# Altium PCB MCPS Supply 030523.PcbDoc
Units mm, origin at the board's own origin, x right, y up, seen from the top; angles counter-clockwise.
Board outline 140 x 100.33 mm, 2 copper layers (Top Layer, Bottom Layer); 45 components, 22 nets, 100 pads, 8 vias.
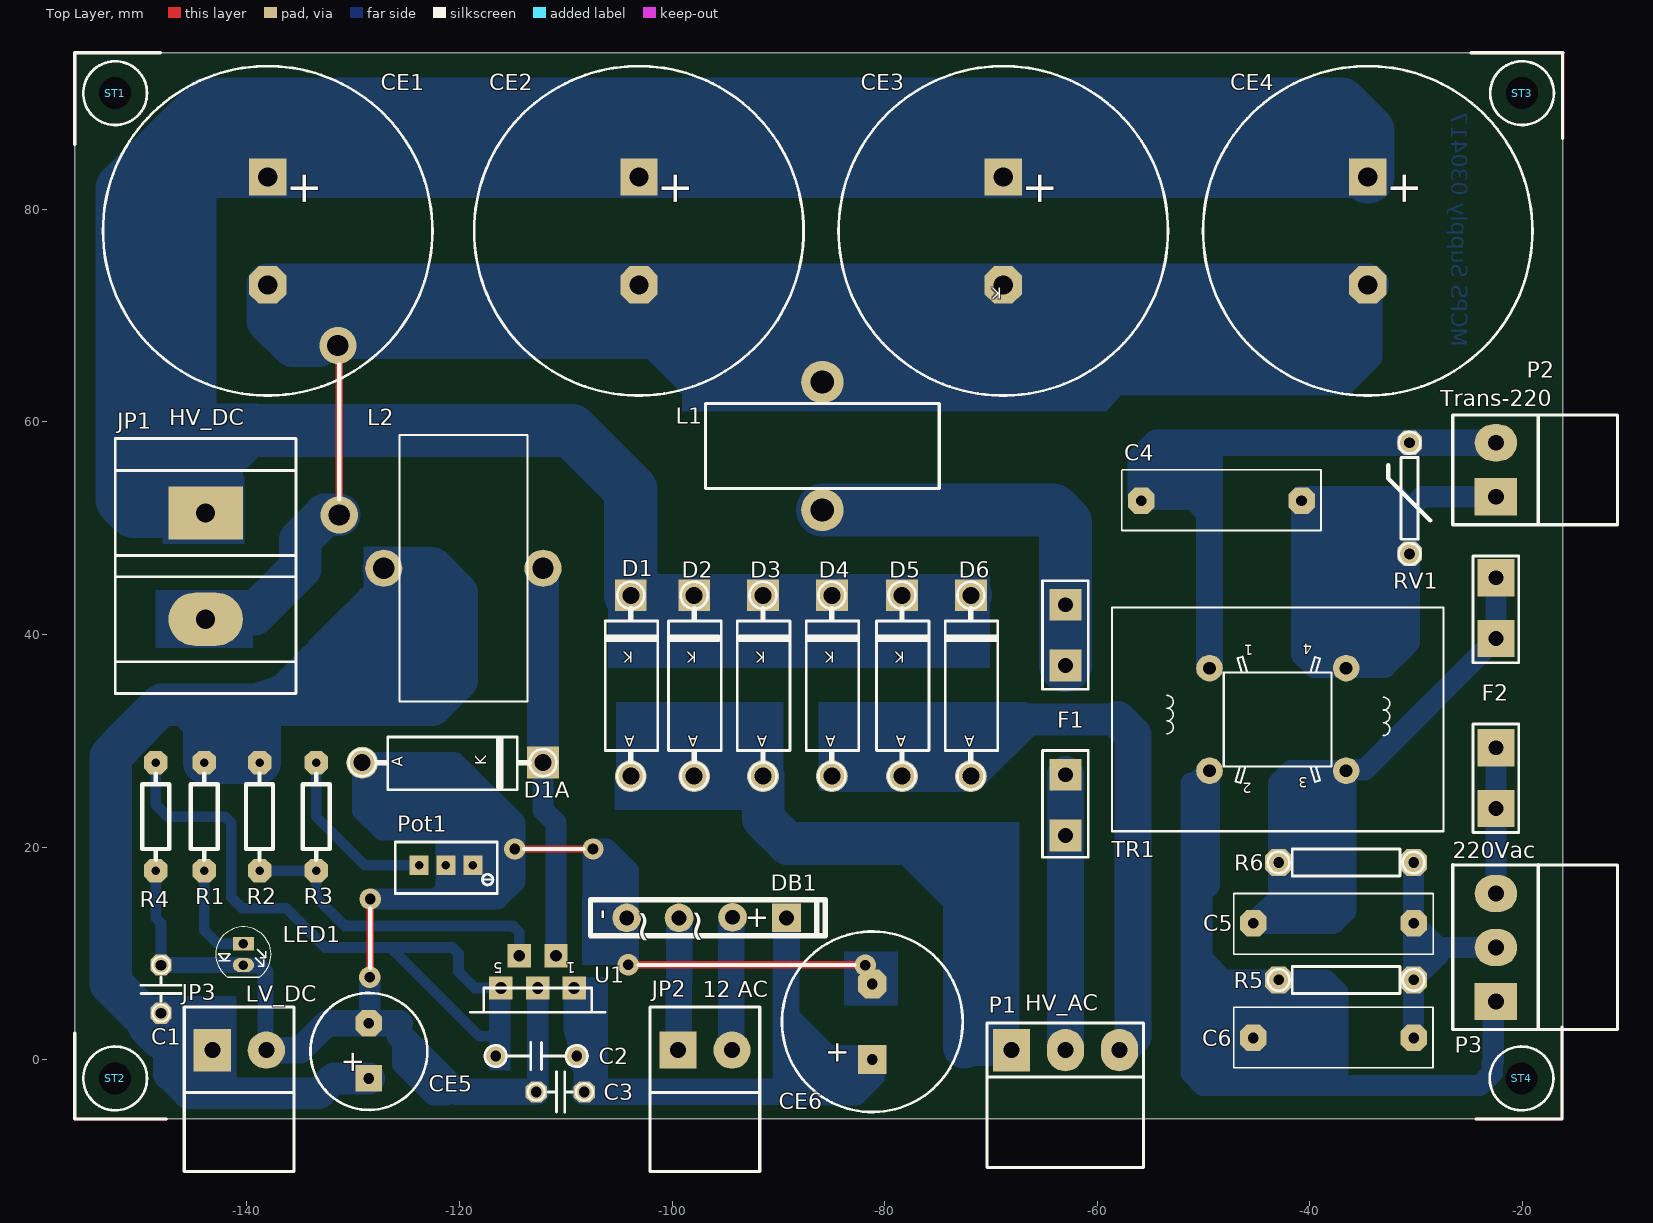
[diagram p0: Top Layer view]
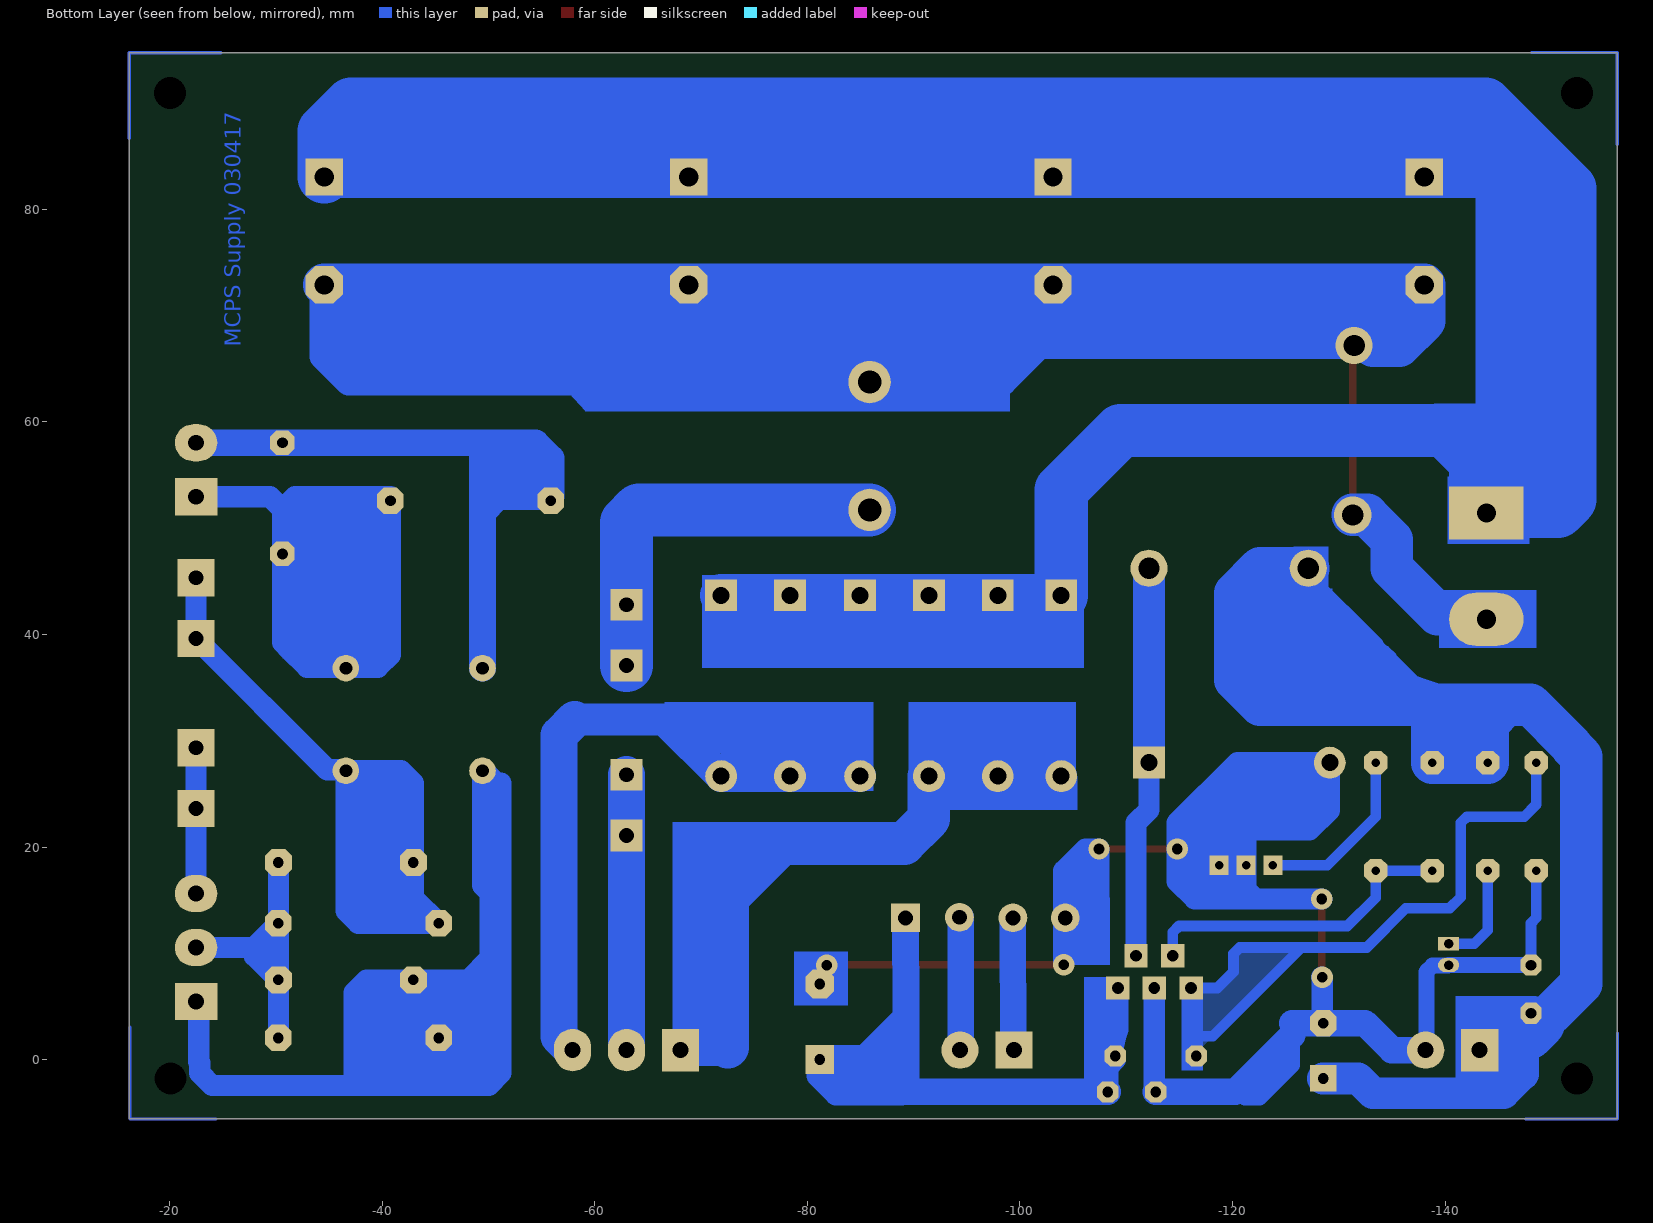
[diagram p1: Bottom Layer view, seen from below]

## Layer stack, top to bottom
Top Solder: solder mask 0.0102, Solder Resist, Dk 3.5
Top Layer: signal copper 0.0356
Dielectric1: dielectric 0.32, FR-4, Dk 4.8
Bottom Layer: signal copper 0.0356
Bottom Solder: solder mask 0.0102, Solder Resist, Dk 3.5

## Board outline
-156.21,-5.588 -156.21,94.742 -16.21,94.742 -16.21,-5.588

## Design rules (kind name [scope] priority, off if disabled: settings)
Clearance [All] p1: gap=0.3 ignorepadtopadclearanceinfootprint=FALSE
ComponentClearance [All] p1 off: gap=0.254 collisioncheckmode=3 verticalgap=0.254 showdistances=FALSE
PolygonConnect [All] p1: connectstyle=Direct reliefconductorwidth=1 reliefentries=4 polygonreliefangle="90 Angle" airgapwidth=0.3
RoutingVias [All] p1: holewidth=0.711 width=1.27 viastyle="Through Hole" minholewidth=0.711 minwidth=1.27 maxholewidth=0.711 maxwidth=1.27
SilkToSolderMaskClearance SilkscreenOverComponentPads [IsPad] p1: minsilkscreentomaskgap=0.254 clearancetoexposedcopper=TRUE
SolderMaskExpansion [All] p1: expansion=0.102 istentingtop=FALSE
UnRoutedNet [All] p1: checkbadconnections=TRUE
Width [All] p1: maxlimit=5 minlimit=0.3 preferedwidth=0.7 minimp=50.000000 maximp=50.000000 favimp=50.000000
27 further rules are at their usual default settings.

## Components (designator, comment, footprint, x,y, rotation, side; value= is the part's Value field where it differs from the comment)
C1 "100N" c1.8p -148.082,4.369 r90 top locked
C2 "100N" C3P -108.979,0.33 r180 top
C3 "100N" c1.8p -108.255,-3.048 r180 top
C4 "47N/275" 47N275 -38.938,52.629 r180 top locked
C5 "47N/275" 47N275 -47.142,12.776 r0 top locked
C6 "47N/275" 47N275 -28.397,2.083 r180 top locked
CE1 "1200M/160V" CAP5P -138.049,83.058 r270 top locked
CE2 "1200M/160V" CAP5P -103.124,83.058 r270 top locked
CE3 "1200M/160V" CAP5P -68.834,83.058 r270 top locked
CE4 "1200M/160V" CAP5P -34.544,83.058 r270 top locked
CE5 "1000M/63" CAP2P -128.524,-1.778 r180 top locked
CE6 "2200M/25" CAP3P -81.915,0.127 r180 top locked
D1 "1N5408" D54 -103.886,35.179 r180 top locked
D1A "1N5822" d54 -120.65,27.94 r90 top locked
D2 "1N5408" D54 -97.917,35.179 r180 top locked
D3 "1N5408" D54 -91.44,35.179 r180 top locked
D4 "1N5408" D54 -84.963,35.179 r180 top locked
D5 "1N5408" D54 -78.359,35.179 r180 top locked
D6 "1N5408" D54 -71.882,35.179 r180 top locked
DB1 "4Amp" "BRG GBU" -104.267,13.335 r270 top locked
F1 "5A" FS#1 -62.992,42.799 r270 top locked
F2 "1A5" FS#2 -22.479,23.622 r90 top locked
JP1 "HV_DC" DG55X2 -143.891,51.435 r270 top locked
JP2 "12 AC" 2edg-str#1 -99.441,0.889 r180 top locked
JP3 "LV_DC" 2edg-str#2 -143.256,0.889 r180 top locked
L1 "2mH/5A" INDUCTOR2208 -85.852,57.734 r0 top locked
L2 "100UH" Inductor2512 -119.634,46.228 r90 top locked
LED1 "Red" LED-5mm -140.325,10.89 r0 top locked
P1 "HV_AC" 3EDG -68.072,0.889 r180 top locked
P2 "Trans-220" 2EDG-str -22.479,52.959 r270 top locked
P3 "220Vac" 3EDG-str -22.454,5.436 r270 top locked
Pot1 "1K" "pot multi turn" -118.745,18.288 r90 top locked
R1 "1K" R4P -144.018,27.94 r0 top locked
R2 "10K%" R4P -138.811,27.94 r0 top locked
R3 "3K%" R4P -133.477,17.78 r180 top locked
R4 "10K%" R4P -148.59,27.94 r0 top locked
R5 "470K" R5P -30.226,7.493 r180 top locked
R6 "470K" R5P -42.926,18.542 r0 top locked
RV1 "250Vrms" VARISTOR3 -30.607,52.807 r180 top locked
ST1 "STUD" CORNER -156.21,94.742 r0 top locked
ST2 "STUD" CORNER -156.21,-5.588 r90 top locked
ST3 "STUD" CORNER -16.21,94.742 r270 top locked
ST4 "STUD" CORNER -16.256,-5.588 r180 top locked
TR1 "CMT" CMT1 -43.002,32.004 r270 top locked
U1 "LM2576T-ADJ" PENTA1 -109.22,6.731 r270 top locked

## Footprints (in the part's own frame and the unit in brackets; to place one, negate y for a bottom-side part, rotate by r counter-clockwise, add the part's x,y. Pads: shape width x height; smd on the part's side, far side on the other; paste and mask are expansions set on the pad)
2edg-str#1 [mm]
  rect 3.5x3.5 hole 1.5: 1(0,0)
  round 3.5 hole 1.5: 2(-5.08,0)
  silkscreen extent -7.7,-4.06 2.64,11.43
2edg-str#2 [mm]
  rect 3.5x4 hole 1.5: 1(0,0)
  round 3.5 hole 1.5: 2(-5.08,0)
  silkscreen extent -7.7,-4.06 2.64,11.43
2EDG-str [mm]
  rect 3.5x4 hole 1.5: 1(0,0)
  oval 3.5x4 hole 1.5: 2(-5.08,0)
  silkscreen extent -7.7,-4.06 2.64,11.43
3EDG [mm]
  rect 3.5x4 hole 1.5: 1(0,0)
  oval 3.5x4 hole 1.5: 2(-5.08,0) 3(-10.16,0)
  silkscreen extent -12.45,-2.54 2.29,11.05
3EDG-str [mm]
  rect 3.5x4 hole 1.5: 1(-0.025,-0.025)
  oval 3.5x4 hole 1.5: 2(-5.105,-0.025) 3(-10.185,-0.025)
  silkscreen extent -12.93,-4.09 2.62,11.41
47N275 [mm]
  oct 2.5x2.5 hole 1: 1(1.829,0.051) 2(16.916,0.051)
  silkscreen extent 0,-2.85 18.75,2.86
"BRG GBU" [mm]
  round 2.7 hole 1.4: 1(0,4.928) 2(0,0) 3(-0.051,9.957)
  rect 2.7x2.7 hole 1.4: 4(0,15.037)
  silkscreen extent -1.7,-3.41 1.7,18.69
c1.8p [mm]
  oct 2x2 hole 1: 1(0,0) 2(4.521,0)
  silkscreen extent -0.8,-1.91 5.32,1.9
C3P [mm]
  oct 2x2 hole 1: 1(0,0) 2(7.62,0)
  silkscreen extent -1.02,-1.27 8.63,1.27
CAP2P [mm]
  rect 2.5x2.5 hole 1: 1(0,0)
  oct 2.5x2.5 hole 1: 2(0,-5.207)
  silkscreen extent -5.5,-8.04 5.5,2.96
CAP3P [mm]
  rect 2.7x2.7 hole 1: 1(-0.762,0.127)
  oct 2.7x2.7 hole 1: 2(-0.762,-6.985)
  silkscreen extent -9.26,-11.93 7.73,5.07
CAP5P [mm]
  rect 3.5x3.5 hole 1.8: 1(0,0)
  oct 3.5x3.5 hole 1.8: 2(10.16,0)
  silkscreen extent -10.42,-15.5 20.58,15.5
CMT1 [mm]
  round 2.5 hole 1.2: 1(-4.826,-6.426) 2(4.826,-6.426) 3(4.826,6.426) 4(-4.826,6.426)
  silkscreen extent -10.52,-15.6 10.52,15.6
CORNER [mm]
  round 2 hole 3: 1(3.81,-3.81)
  Multi-Layer lines w0.3: 0,-8.623 0,0.013 8.09,0.013
  silkscreen extent 0,-8.62 8.09,0.01
D54 [mm]
  round 3 hole 1.6: 1(0,8.509)
  rect 3x3 hole 1.6: 2(0,-8.509)
  silkscreen extent -2.54,-9.78 2.41,9.78
d54 [mm]
  round 3 hole 1.6: 1(0,8.509)
  rect 3x3 hole 1.6: 2(0,-8.509)
  silkscreen extent -2.54,-9.78 2.41,9.78
DG55X2 [mm]
  rect 5x7 hole 1.8: 1(0,0)
  oval 5x7 hole 1.8: 2(10,0)
  silkscreen extent -7,-8.5 17,8.5
FS#1 [mm]
  rect 3x3 hole 1.4: 1(0,0) 2(21.717,0) ""(5.715,0) ""(16.002,0)
  silkscreen extent -2.25,-2.16 23.76,2.16
FS#2 [mm]
  rect 3.5x3.5 hole 1.4: 1(0,0) 2(21.717,0) ""(5.715,0) ""(16.002,0)
  silkscreen extent -2.25,-2.16 23.76,2.16
INDUCTOR2208 [mm]
  round 4 hole 2.2: 1(0,6.02) 2(0,-6.02)
  silkscreen extent -11,-3.99 11,3.99
Inductor2512 [mm]
  round 3.5 hole 2: 1(0,7.493) 2(0,-7.493)
  silkscreen extent -12.52,-6.02 12.52,6.02
LED-5mm [mm]
  rect 2x1.3 hole 0.9: 1(-0.01,0)
  oval 2x1.3 hole 0.9: 2(-0.01,-2)
  silkscreen extent -2.61,-3.13 2.59,1.6
PENTA1 [mm]
  rect 2.2x2.2 hole 1.1: 1(0,0) 2(-3.048,-1.702) 3(0,-3.429) 4(-3.048,-5.156) 5(0,-6.883)
  silkscreen extent 0,-9.78 2.29,2.92
"pot multi turn" [mm]
  rect 1.8x1.8 hole 0.8: 1(0,5.06) 2(0,0) 3(0,2.53)
  silkscreen extent -2.67,-2.29 2.18,7.29
R4P [mm]
  oct 2.2x2.2 hole 0.8: 1(0,0) 2(0,-10.16)
  silkscreen extent -1.27,-9.14 1.27,-1.02
R5P [mm]
  oct 2.54x2.54 hole 1: 1(0,0) 2(12.7,0)
  silkscreen extent -1.02,-1.27 13.71,1.27
VARISTOR3 [mm]
  oct 2.3x2.3 hole 1: 1(0,5.232) 2(0,-5.232)
  silkscreen extent -1.95,-6.25 2.01,6.25

## Part data
C1 C2 C3 C4 C5 C6: library part C
CE1 CE2 CE3 CE4 CE5 CE6: library part E
D1 D2 D3 D4 D5 D6: library part D
D1A: library part Diode, "Default Diode", Code_JEDEC=DO-214-AB, LatestRevisionDate=17-Jul-2002, LatestRevisionNote="Re-released for DXP Platform.", PackageDescription="DO-214-AB/SMC; 2 C-Bend Leads; Body 7.9 x 5.9 mm, inc. leads (LxW)", PackageReference=SMC, PackageVersion=Sep-1996, Published=8-Jun-2000, Publisher="Altium Limited"
DB1: library part BRIDGE
F1 F2: library part FUSE1
JP1 JP2 JP3 P2: library part "Header 2", "Header, 2-Pin", LatestRevisionDate=17-Jul-2002, LatestRevisionNote="Re-released for DXP Platform.", Publisher="Altium Limited"
L1: library part INDUCTOR
L2: library part "INDUCTOR IRON"
LED1: library part LED, "LED", Adding Date=1387/12/22, Color=Red, Designer="Saeid Jorablo", Organazation=ControTec, Size="SMD 1206"
P1 P3: library part "Header 3", "Header, 3-Pin", LatestRevisionDate=17-Jul-2002, LatestRevisionNote="Re-released for DXP Platform.", Publisher="Altium Limited"
Pot1: library part POT2
R1 R2 R3 R4 R5 R6: library part R
RV1: library part VARISTOR
TR1: library part TRANS1
U1: library part LM2576

## Via types
v1: diameter 2, hole 1, Top Layer to Bottom Layer, 6 vias
v2: diameter 3.5, hole 2, Top Layer to Bottom Layer, 2 vias

## Nets (pads, with @x,y where several pads share a name; then routed paths per layer and width w, separated by ;. In a path a pad name is that pad's centre, name@x,y a point inside that pad or via, vN(x,y) a via of type N, cw(c..) or ccw(c..) an arc to the next point about the centre after c; other vN are vias at no path point)
ERTH: C5.2 C6.1 P3.2 R5.1 R6.2 | length 29.2
  Bottom Layer w2: C6.1 R5.1 ; R6.2 C5.2 ; P3.2 -27.94,10.541 ; R5.1 C5.2 ; R5.1 -27.94,9.779 -27.94,10.541 ; C5.2 -27.94,10.541
GND5: C1.2 C3.2 CE5.2 CE6.2 D1A.1 DB1.2 JP3.2 LED1.2 Pot1.2 Pot1.3 R4.2 U1.3 | length 200.4
  Top Layer w0.7: v1@-128.397,7.747 v1(-128.397,15.113) ; v1(-114.808,19.812) v1(-107.442,19.812) ; v1(-104.114,8.916) v1@-81.814,8.916
  Bottom Layer w1: R4.2 -148.59,13.335 -148.082,12.827 C1.2 ; LED1.2 LED1.2@-140.278,8.833 ; JP3.2@-138.235,0.948 JP3.2
  Bottom Layer w1.5: C1.2 LED1.2 ; LED1.2@-140.278,8.833 -138.821,8.833 -138.235,8.247 JP3.2@-138.235,0.948 ; -125.603,3.429 -125.603,2.286 -125.603,-0.508 -122.555,-3.556 -121.158,-3.556
  Bottom Layer w2: CE5.2 -128.449,3.504 -128.449,7.695 v1@-128.397,7.747 ; v1(-128.397,15.113) -122.163,15.113 ; -120.269,21.463 -120.396,21.59 -121.275,21.59 ; C3.2 -112.649,-2.921 U1.3 ; -104.267,17.526 -104.13,17.663 ; CE6.2@-81.28,7.239 CE6.2 ; -123.854,27.94 -120.463,27.94 -114.808,22.285 v1(-114.808,19.812) -114.808,16.764 -116.459,15.113 -122.163,15.113 ; -123.854,27.94 -121.275,25.361 -121.275,21.59 ; -123.854,27.94 D1A.1 -129.104,27.885 -129.104,23.44 -127.254,21.59 -121.275,21.59 ; -122.163,15.113 -121.275,16.001 Pot1.3 -121.275,21.59 ; -104.13,17.663 -104.117,17.65 -104.117,16.255 ; -104.13,17.663 -104.117,16.255 ; -104.13,17.663 -104.131,17.771 -106.172,19.812 v1(-107.442,19.812) -107.442,14.641 -106.27,13.469 -104.401,13.469 DB1.2 -104.098,13.507 -104.098,14.14 -104.098,14.149 -104.098,14.155 ccw(c-106.098,14.14) -104.098,14.161 -104.117,16.255
  Bottom Layer w2.5: JP3.2 -135.001,0.889 -132.461,3.429 CE5.2 -125.603,3.429 ; -125.603,2.286 -120.269,-3.048 C3.2
  other v1: -128.449,7.747 -81.814,8.864
HV: CE1.1 CE2.1 CE3.1 CE4.1 D1.2 D2.2 D3.2 D4.2 D5.2 D6.2 JP1.1 | length 371.1
  Bottom Layer w4: -150.643,83.058 -144.399,83.058 CE1.1 CE2.1 CE3.1 CE4.1 ; JP1.1@-144.018,51.562 JP1.1 JP1.1@-142.691,51.435 ; D1.2 D2.2 D3.2 D4.2 D5.2 D6.2
  Bottom Layer w5: JP1.1@-144.018,51.562 -150.643,51.562 -151.765,52.684 -151.765,81.936 -150.643,83.058 -143.785,89.916 -37.084,89.916 -34.544,87.376 CE4.1 ; JP1.1 -142.891,51.435 -142.891,56.253 -139.962,59.182 -109.474,59.182 -103.886,53.594 D1.2
NetC1_1: C1.1 CE5.1 JP3.1 L2.1 R1.1 R2.1 | length 166
  Bottom Layer w1: -135.001,33.401 -135.001,36.322 -135.001,37.846 -134.366,38.481 ; -133.731,39.116 -127.127,45.72 -127.127,46.203 L2.1
  Bottom Layer w3: -150.114,4.445 -148.082,4.445 C1.1 ; -148.082,2.061 -147.32,1.299 ; -142.506,-2.257 -142.506,-1.772 -142.506,0.139 JP3.1 -146.91,0.889 -147.32,1.299 ; -137.922,33.401 -135.001,36.322 -132.969,38.354 -132.334,38.354 ; CE5.1 -131.826,-1.778 -133.223,-3.175 -145.488,-3.175 -147.32,-1.343 -147.32,1.299 ; -126.902,33.401 -125.73,34.573
  Bottom Layer w4: -150.114,4.445 -152.819,7.15 -152.819,28.512 -151.99,29.342 -151.99,29.443 -148.032,33.401 -145.775,33.401 ; -149.236,3.215 -148.082,2.061 ; L2.1@-127.127,46.203 -125.73,44.806 -125.73,34.573 ; L2.1 -122.612,46.228 -120.269,43.885 -120.269,35.744 -122.612,33.401 -126.902,33.401 -135.001,33.401 -137.922,33.401 ; -145.775,33.401 -144.018,33.401 -137.922,33.401 ; -145.775,33.401 -144.018,31.644 R1.1 R2.1 -138.811,32.512 -137.922,33.401
NetC2_1: C2.1 C3.1 CE6.1 DB1.4 U1.1 | length 67.6
  Bottom Layer w2: U1.1 -109.22,2.794 -108.991,2.565 ; C2.1@-108.991,0 -108.357,-0.634 ; C2.1@-108.547,0.169 -109.105,2.54 -107.632,2.54 ; C3.1 -108.255,-1.069 ; -89.281,-2.921 -88.9,-3.302 -82.675,-3.302 -80.899,-1.526 -80.899,0.381 -85.344,0.381 -89.281,4.318
  Bottom Layer w2.5: C3.1 -89.154,-3.048 ; -89.281,-2.921 -89.281,4.318 DB1.4
NetC2_2: C2.2 R4.1 U1.5 | length 71
  Bottom Layer w1: R4.1@-148.786,27.277 -148.786,27.34 R4.1 -148.59,24.003 -147.447,22.86 -142.064,22.86 -141.478,22.274 -141.478,15.276 -140.426,14.224 -136.314,14.224 -132.631,10.541 -126.365,10.541 ; C2.2@-116.611,0 -116.611,2.075 -116.721,2.184 -118.135,2.184 -126.365,10.414 -126.365,10.541 ; C2.2@-116.586,0.66 -116.586,3.175 -116.103,3.658 U1.5 -118.567,6.731 -120.091,8.255 -120.091,9.955 -120.677,10.541 -126.365,10.541
NetC4_1: C4.1 P2.1 RV1.1 TR1.4 | length 58.3
  Bottom Layer w2: P2.1 -29.435,52.959 -30.607,51.787 ; -30.607,51.787 -31.779,52.959 -40.767,52.959 -40.767,38.097 -39.595,36.926 -36.672,36.926 TR1.4 -36.48,36.926 -32.924,36.926 -31.294,38.556 -30.607,39.243 RV1.1 -30.607,51.787
NetC4_2: C4.2 P2.2 RV1.2 TR1.1 | length 65.9
  Bottom Layer w2.5: TR1.1 -49.428,51.495 ; P2.2 RV1.2 -49.276,58.039 ; -49.428,51.495 -49.428,57.887 -49.276,58.039 ; -49.428,51.495 -50.893,52.959 -55.855,52.959 -55.88,52.984 -55.88,56.575 -54.416,58.039 -49.276,58.039
NetD1_1: D1.1 D2.1 D3.1 P1.1 | length 57.2
  Bottom Layer w3: D1.1 D2.1 -93.218,26.67 D3.1
  Bottom Layer w3.5: -72.517,1.139 -68.072,1.139 P1.1
  Bottom Layer w4: D3.1 -91.44,22.663 -89.097,20.32 -77.597,20.32 -72.517,15.24 -72.517,1.139
NetD1A_2: D1A.2 L2.2 U1.2 | length 37
  Bottom Layer w2: D1A.2@-112.141,29.178 D1A.2 -112.141,23.495 -110.922,22.276 U1.2
  Bottom Layer w3: D1A.2@-112.141,29.178 L2.2
NetD4_1: D4.1 D5.1 D6.1 P1.3 | length 61.3
  Bottom Layer w3: D4.1 D5.1 D6.1 -66.548,32.004 -58.106,32.004
  Bottom Layer w3.5: -58.106,32.004 -56.642,30.54 -56.642,2.159 P1.3
NetDB1_1: DB1.1 JP2.1 | length 12.5
  Bottom Layer w1: JP2.1 JP2.1@-99.263,1.067
  Bottom Layer w2.5: JP2.1@-99.39,1.067 DB1.1
NetDB1_3: DB1.3 JP2.2 | length 12.5
  Bottom Layer w2: JP2.2@-94.424,1.079 JP2.2@-94.297,0.953
  Bottom Layer w2.5: JP2.2@-94.424,1.079 DB1.3@-94.424,13.386
NetF1_1: F1.1 F1.@-62.992,37.084 L1.2 | length 36.8
  Bottom Layer w5: L1.2 -64.164,51.714 -62.992,50.543 F1.1 F1.@-62.992,37.084
NetF1_2: F1.2 F1.@-62.992,26.797 P1.2 | length 25.9
  Bottom Layer w3.5: P1.2 F1.2 F1.@-62.992,26.797
NetF2_1: F2.1 F2.@-22.479,29.337 P3.3 | length 13.7
  Bottom Layer w2: P3.3 F2.1 F2.@-22.479,29.337
NetLED1_1: LED1.1 R1.2 | length 9.8
  Bottom Layer w1: R1.2 -144.018,12.173 -142.735,10.89 LED1.1
NetPot1_1: Pot1.1 R3.2 | length 16.6
  Bottom Layer w1: R3.2 -133.477,22.86 -128.905,18.288 Pot1.1
NetR2_2: R2.2 R3.1 U1.4 | length 30.5
  Bottom Layer w1: R2.2 R3.1 -133.477,15.24 -130.81,12.573 -114.962,12.573 -114.376,11.987 U1.4
NL: C6.2 P3.1 R5.2 TR1.2 | length 118.1
  Bottom Layer w2: P3.1 -22.729,5.211 -22.729,-0.197 -22.82,-0.288 -22.82,-1.27 -23.992,-2.442 -37.338,-2.442 ; -43.913,-2.442 -37.338,-2.442 ; -43.913,-2.442 -50.009,-2.442 -51.181,-1.27 -51.181,26.006 -50.735,26.006 -49.564,27.178 TR1.2 -49.428,16.408 -50.165,15.672 -50.165,9.525 -48.133,7.493 R5.2 ; -43.913,-2.442 -45.339,-1.016 -45.339,2.007 C6.2 -42.926,4.42 R5.2 ; R5.2 -38.51,7.493 -37.338,6.321 -37.338,-2.442
PGND: CE1.2 CE2.2 CE3.2 CE4.2 JP1.2 L1.1 | length 254.9
  Top Layer w0.7: v2(-131.318,51.244) v2@-131.318,66.992
  Bottom Layer w2.5: v2@-133.032,67.374 -133.223,67.183 v2(-131.445,67.183) -101.854,67.183 -98.425,63.754 L1.1 -36.83,63.754 -34.417,66.167 -34.417,72.771 CE4.2
  Bottom Layer w4: JP1.2 -143.7,41.626 -141.993,41.626 -141.722,41.897 -139.332,41.897 -135.001,46.228 -135.001,48.901 -132.658,51.244 v2(-131.318,51.244) ; -133.223,67.183 -135.706,67.183 -138.049,69.526 CE1.2 CE2.2 CE3.2 CE4.2
PH: C5.1 F2.2 F2.@-22.479,39.624 R6.1 TR1.3 | length 75.2
  Bottom Layer w2: F2.2 -22.479,39.624 -34.829,27.274 -36.48,27.274 TR1.3 ; R6.1 -42.926,26.006 -41.754,27.178 TR1.3 ; R6.1 -42.926,15.215 C5.1 -37.748,12.827 -36.576,13.999 -36.576,19.714 ; R6.1 -37.748,18.542 -36.576,19.714 ; -36.576,19.714 TR1.3
pads on no net: ST1.1 ST2.1 ST3.1 ST4.1

## Polygon pours and split planes (outlines as drawn)
NetC2_2 on Bottom Layer "NETC2_2_L02_P000" (solid, pour order 0): -116.611,0 -116.586,0.026 -116.586,3.175 -115.951,3.81 -116.103,3.962 -116.103,6.731 -118.567,6.731 -120.091,8.255 -120.091,9.955 -120.677,10.541 -125.73,10.541 -125.73,9.779 -125.705,9.779 -116.586,0.66

## Other copper
Bottom Layer:
  rectangle net NetC1_1: -148.59,-0.635 -140.97,5.969
  rectangle net HV: -144.018,58.435 -138.938,61.722
  rectangle net HV: -145.669,55.88 -142.875,82.169
  region net PGND: -60.863,62.643 -59.09,61.006 -57.023,63.246 -58.796,64.883
  rectangle net PGND: -99.06,60.96 -59.055,63.373
  rectangle net NetD1_1: -75.692,17.653 -72.517,20.701
  rectangle net NetD1_1: -89.789,20.32 -71.882,22.352
  rectangle net NetD1_1: -72.898,0.889 -67.31,22.352
  rectangle net GND5: -83.82,5.08 -78.74,10.16
  rectangle net GND5: -108.458,8.89 -103.124,15.24
  rectangle net NetD1_1: -105.41,23.495 -91.44,26.67
  rectangle net NetC2_2: -117.221,-1.016 -115.189,7.239
  rectangle net NetC2_1: -109.22,-2.667 -106.045,7.747
  rectangle net NetC1_1: -129.032,41.529 -125.73,48.26
  rectangle net PH: -42.926,13.081 -36.83,18.796
  rectangle net NetC1_1: -124.841,34.417 -119.888,44.831
  region net NetC1_1: -140.836,32.515 -135.782,34.234 -136.512,36.381 -141.567,34.662
  rectangle net GND5: -128.397,22.098 -121.031,27.686
  rectangle net NL: -45.466,-2.159 -37.924,6.907
  rectangle net GND5: -107.442,13.716 -104.648,19.304
  rectangle net NL: -50.419,6.096 -49.022,8.89
  rectangle net NL: -50.673,-1.778 -45.212,6.731
  rectangle net NL: -50.673,2.794 -43.434,7.493
  rectangle net PH: -42.545,19.05 -36.576,27.178
  rectangle net NetC4_2: -54.737,53.594 -50.419,58.039
  rectangle net NetC4_1: -39.925,37.719 -30.607,52.197
  rectangle net PGND: -148.59,38.735 -139.446,44.196
  rectangle net NetC1_1: -142.494,29.083 -139.446,32.766
  rectangle net ERTH: -29.464,9.398 -28.067,10.795
  rectangle net HV: -149.479,51.943 -144.907,82.169
  region net NetC1_1: -134.083,38.96 -130.112,34.988 -124.206,40.894 -128.177,44.865
  rectangle net NetC1_1: -129.413,35.687 -126.746,44.323
  rectangle net NetC1_1: -134.747,34.925 -125.984,38.862
  rectangle net NetC1_1: -146.939,-2.032 -144.526,0
  rectangle net NetC1_1: -150.495,2.159 -149.352,3.175
  rectangle net NetC1_1: -145.415,-3.683 -142.506,0.139
  rectangle net HV: -147.955,48.514 -140.208,54.864
  region net GND5: -122.69,26.53 -116.13,20.344 -114.3,22.285 -120.861,28.471
  rectangle net GND5: -121.031,24.13 -119.253,25.4
  rectangle net GND5: -120.777,21.844 -117.348,24.511
  rectangle net GND5: -120.777,15.494 -117.094,17.907
  rectangle net GND5: -120.777,15.621 -114.809,22.285
  rectangle net NetC2_1: -89.535,-0.635 -86.233,2.159
  rectangle net NetC2_1: -89.027,-3.175 -81.534,0.127
  rectangle net PGND: -37.592,65.278 -34.544,72.263
  rectangle net PGND: -100.711,64.643 -36.449,71.628
  rectangle net PGND: -136.652,67.183 -99.187,71.628
  rectangle net HV: -147.066,84.836 -36.195,88.9
  rectangle net NetD1_1: -105.283,25.273 -89.535,33.655
  rectangle net NetD4_1: -68.834,32.258 -66.548,33.655
  rectangle net NetD4_1: -74.168,28.829 -68.326,33.655
  rectangle net NetD4_1: -86.233,25.273 -71.882,33.655
  rectangle net HV: -106.045,36.83 -70.104,45.593
  text "MCPS Supply 030417" at -26.67,67.056 h1.5 r270

## Silkscreen, mask and mechanical layers (free items; w line width, h text height)
Top Overlay:
  lines w0.4: -131.318,52.705 -131.318,65.405 ; -128.397,8.636 -128.397,14.224 ; -113.919,19.812 -108.331,19.812 ; -103.124,8.89 -82.83,8.89
Mechanical 1:
  the board outline again, w0.3

## Text inside footprints (layer, text, board x,y; h text height)
CE1: Top Overlay "+" at -135.89,83.693 h3 r270
CE2: Top Overlay "+" at -100.965,83.693 h3 r270
CE3: Top Overlay "+" at -66.675,83.693 h3 r270
CE4: Top Overlay "+" at -32.385,83.693 h3 r270
CE5: Top Overlay "+" at -129.159,-1.397 h2 r90
CE6: Top Overlay "+" at -83.566,-0.508 h2 r90
D1: Top Overlay "K" at -103.632,38.354 h1.02 r180; Top Overlay "A" at -103.505,30.48 h1.02 r180
D1A: Top Overlay "A" at -125.349,27.559 h1.02 r90; Top Overlay "K" at -117.475,27.686 h1.02 r90
D2: Top Overlay "K" at -97.663,38.354 h1.02 r180; Top Overlay "A" at -97.536,30.48 h1.02 r180
D3: Top Overlay "K" at -91.186,38.354 h1.02 r180; Top Overlay "A" at -91.059,30.48 h1.02 r180
D4: Top Overlay "K" at -84.709,38.354 h1.02 r180; Top Overlay "A" at -84.582,30.48 h1.02 r180
D5: Top Overlay "K" at -78.105,38.354 h1.02 r180; Top Overlay "A" at -77.978,30.48 h1.02 r180
D6: Top Overlay "K" at -68.961,72.644 h1.02 r180; Top Overlay "A" at -71.501,30.48 h1.02 r180
DB1: Top Overlay "~" at -103.962,14.199 h3 r270; Top Overlay "~" at -98.882,14.249 h3 r270; Top Overlay "-" at -107.264,14.122 h2 r270; Top Overlay "+" at -90.856,14.199 h2 r180
TR1: Top Overlay "3" at -40.174,26.556 h1 r180; Top Overlay "4" at -39.767,39.104 h1 r180; Top Overlay "1" at -45.305,39.053 h1 r180; Top Overlay "2" at -45.432,26.048 h1 r180
U1: Top Overlay "1" at -109.068,9.144 h1.02 r180; Top Overlay "5" at -115.951,9.144 h1.02 r180